# EAGLE board 006 (EAGLE 9.6.2)
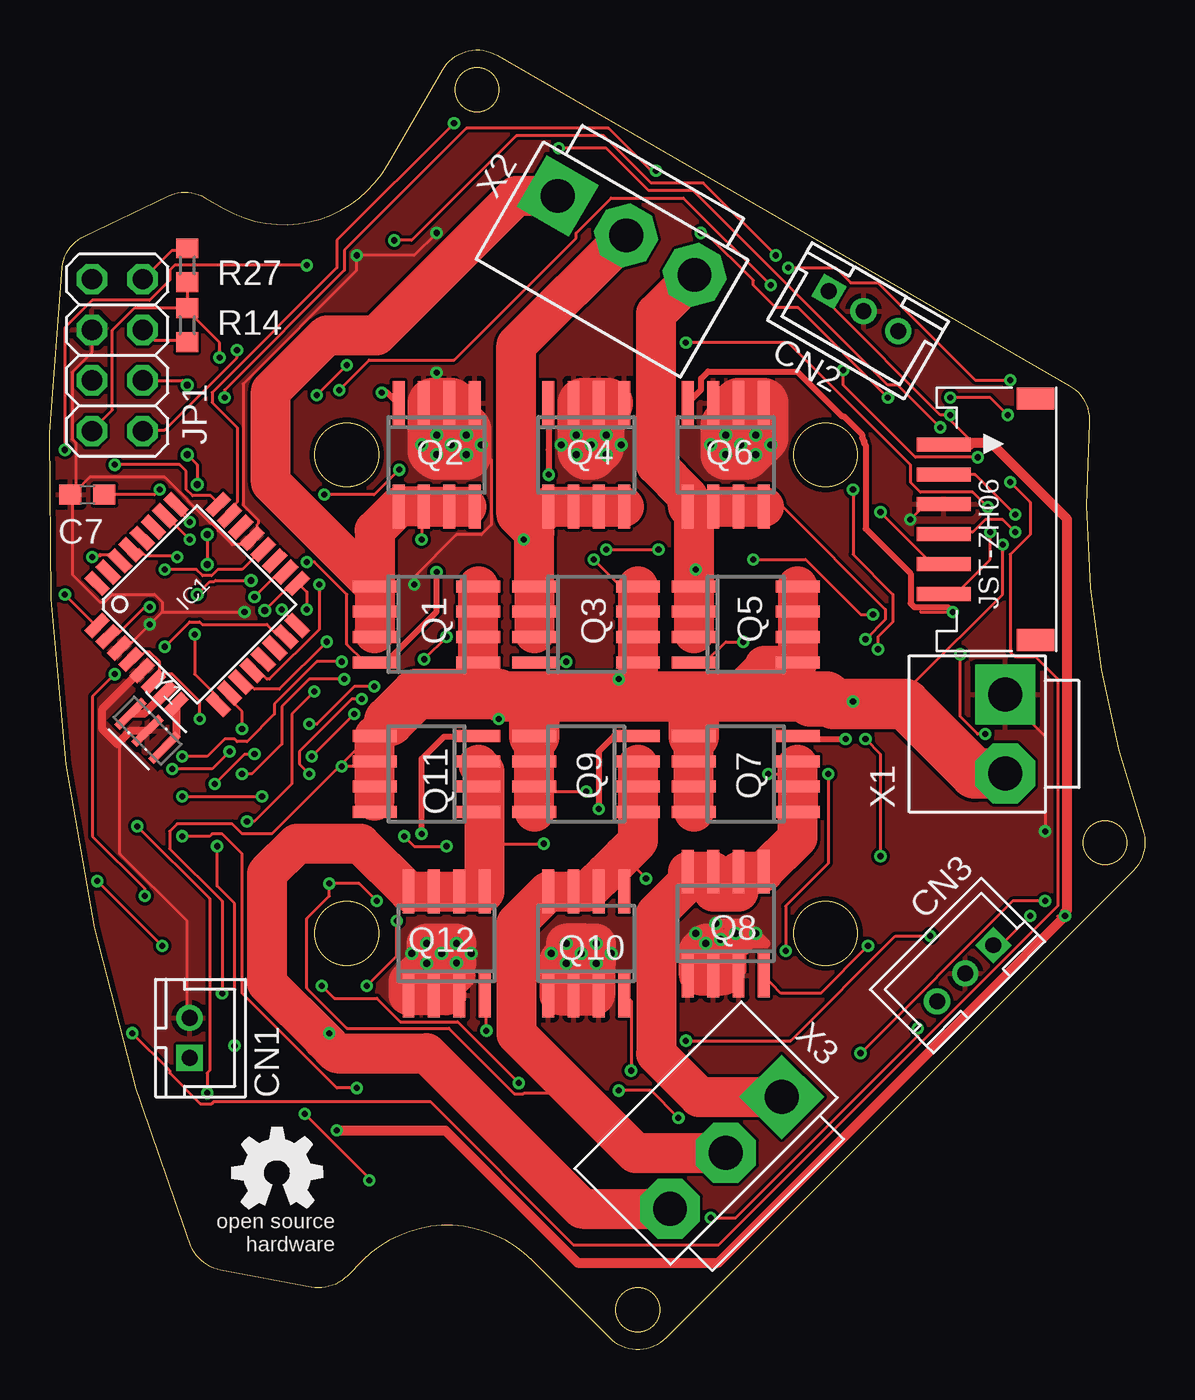
[diagram p0: board, top side]
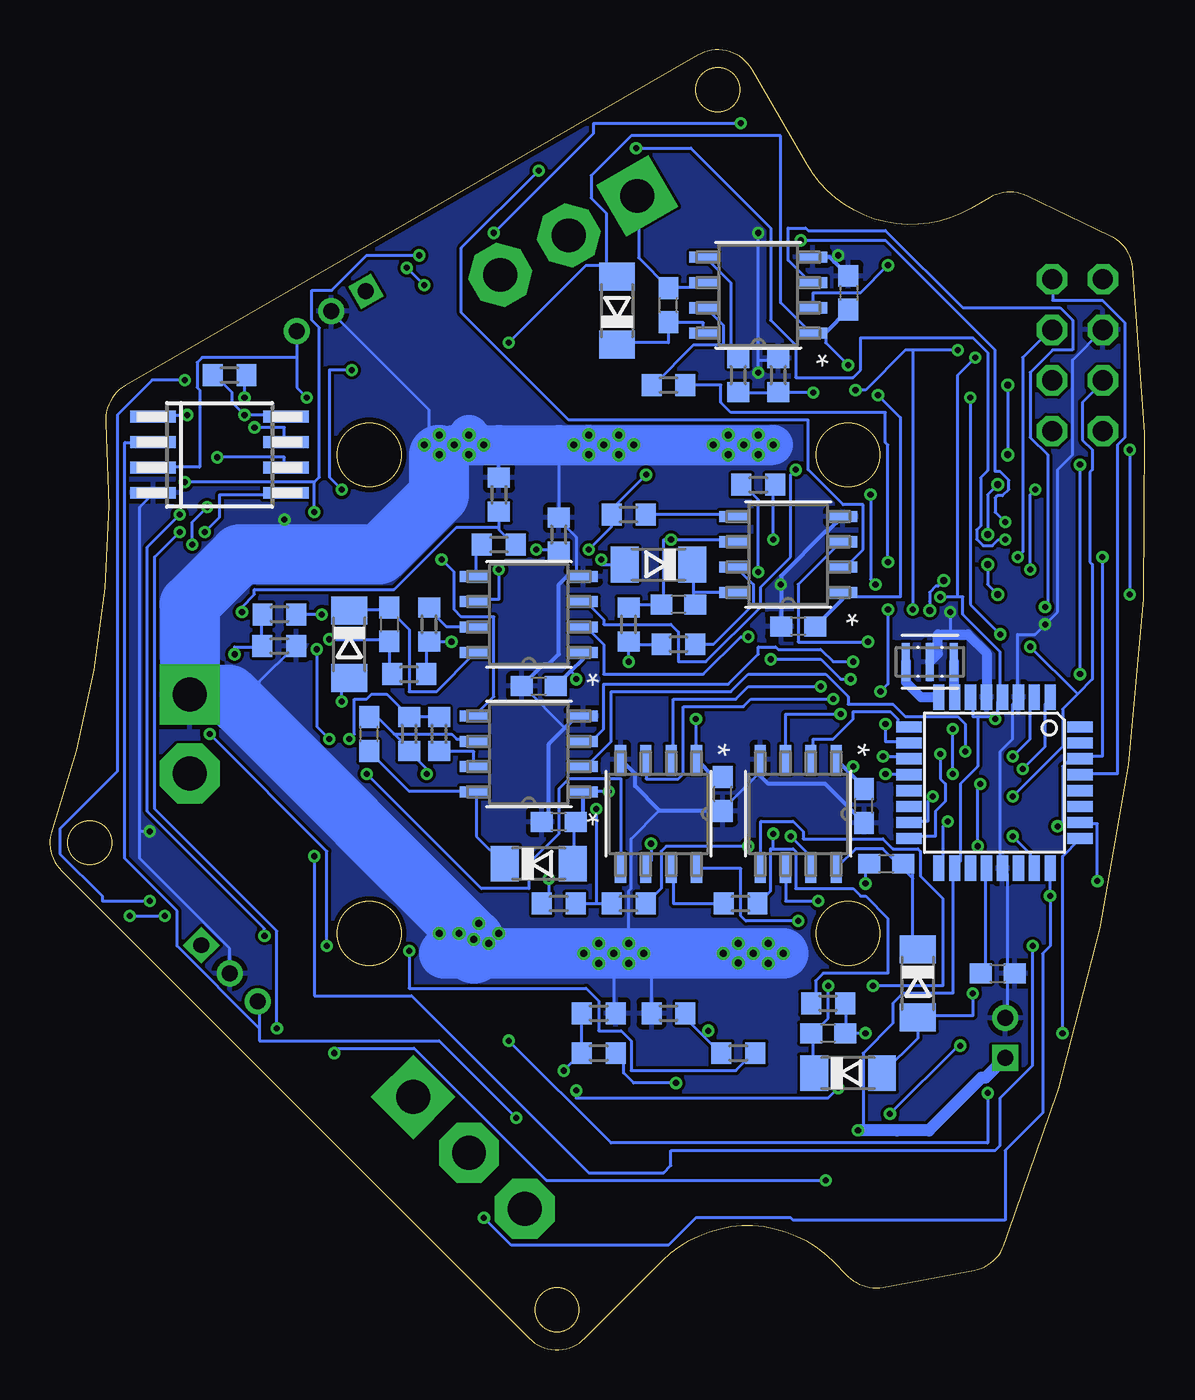
[diagram p1: board, bottom side, seen from below]

Size 54.89 x 65.17 mm. Coordinates in mm from the lower left corner, seen from the top.
Outline: 30.88,0.58 arc-90 28.05,0.58 24.17,4.47 arc90 15.68,4.47 14.89,3.69 arc-56 13.11,3.13 8.56,3.98 arc-58 7.07,5.22 arc-28 0.61,54.26 arc-58 1.73,55.84 5.91,57.84 arc-56 7.77,57.77 8.74,57.21 arc90 16.93,59.41 19.68,64.17 arc-90 22.41,64.9 51.1,48.34 arc-64 52.09,46.46 arc24 54.77,26.08 arc-64 54.3,24 30.88,0.58
Outline: circle at 14.88,20.87 radius 1.6
Outline: circle at 38.88,44.87 radius 1.6
Outline: circle at 38.88,20.87 radius 1.6
Outline: circle at 14.88,44.87 radius 1.6
Outline: circle at 52.89,25.42 radius 1.1
Outline: circle at 29.47,2 radius 1.1
Outline: circle at 21.41,63.17 radius 1.1
Copper layers (1*16): Top 0.035mm / dielectric 1.5mm / Bottom 0.035mm
Design rules "SeeedStudio_2layer_DRU_no_angle_20140221": minimum track width 6mil, minimum drill 12mil, track to track 6mil, track to pad 6mil, pad to pad 6mil, via to via 6mil, smd to smd 0mil, copper to edge 10mil, drill to drill 10mil, minimum pad ring 10mil, minimum via ring 6mil, stop-mask expansion 2mil, vias tented up to drill 100mil, thermal gap 10mil
Net classes: 0 default: width 0.152 mm

## Footprints (pad centres in the part's own frame; a part is rotated, then mirrored left to right if it is on the bottom)
C1608 = smd 1.1 x 1: 1 -0.85,0; 2 0.85,0
B2B-PH-K-S = drill 0.8 square: 1 -1,0 | drill 0.8: 2 1,0
B3B-PH-K-S = drill 0.8 square: 1 -2,0 | drill 0.8: 2 0,0; 3 2,0
SOD80C = smd 1.4 x 1.8: A 1.7,0; C -1.7,0
TQFP32-08 = smd 1.27 x 0.559: 1 -4.293,2.8; 2 -4.293,2; 3 -4.293,1.2; 4 -4.293,0.4; 5 -4.293,-0.4; 6 -4.293,-1.2; 7 -4.293,-2; 8 -4.293,-2.8; 17 4.293,-2.8; 18 4.293,-2; 19 4.293,-1.2; 20 4.293,-0.4; 21 4.293,0.4; 22 4.293,1.2; 23 4.293,2; 24 4.293,2.8 | smd 0.559 x 1.27: 9 -2.8,-4.293; 10 -2,-4.293; 11 -1.2,-4.293; 12 -0.4,-4.293; 13 0.4,-4.293; 14 1.2,-4.293; 15 2,-4.293; 16 2.8,-4.293; 25 2.8,4.293; 26 2,4.293; 27 1.2,4.293; 28 0.4,4.293; 29 -0.4,4.293; 30 -1.2,4.293; 31 -2,4.293; 32 -2.8,4.293
2X04 = drill 1.016 octagon: 1 -3.81,-1.27; 2 -3.81,1.27; 3 -1.27,-1.27; 4 -1.27,1.27; 5 1.27,-1.27; 6 1.27,1.27; 7 3.81,-1.27; 8 3.81,1.27
ZH-SM4-SIDE06 = smd 0.7 x 2.7: 1 -10.35,-5.65; 2 -8.85,-5.65; 3 -7.35,-5.65; 4 -5.85,-5.65; 5 -4.35,-5.65; 6 -2.85,-5.65 | smd 1.1 x 1.9: P$1 -0.55,-1.05; P$2 -12.65,-1.05
SO-08 = smd 0.6 x 2.2: 1 -1.905,-2.6; 2 -0.635,-2.6; 3 0.635,-2.6; 4 1.905,-2.6; 5 1.905,2.6; 6 0.635,2.6; 7 -0.635,2.6; 8 -1.905,2.6
R0603 = smd 1 x 1.1: 1 -0.85,0; 2 0.85,0
PG-DSO-8-910_INF = smd 1.46 x 0.559: 1 -2.724,1.905; 2 -2.724,0.635; 3 -2.724,-0.635; 4 -2.724,-1.905; 5 2.724,-1.905; 6 2.724,-0.635; 7 2.724,0.635; 8 2.724,1.905
SOIC8_EIAJ_208MIL = smd 0.6 x 2.286: 1 -1.905,-3.33; 2 -0.635,-3.33; 3 0.635,-3.33; 4 1.905,-3.33; 5 1.905,3.33; 6 0.635,3.33; 7 -0.635,3.33; 8 -1.905,3.33
B2P-VH = drill 1.7 pad 3 square: 1 -1.98,0 | drill 1.7 pad 3 octagon: 2 1.98,0
B3P-VH = drill 1.7 pad 3 square: 1 -3.96,0 | drill 1.7 pad 3 octagon: 2 0,0; 3 3.96,0
MURATA_CSTNE16M0V53C000R0_0 = smd 0.4 x 1.9: 1 -1.2,0; 2 0,0; 3 1.2,0

## Placement (x,y rotation side)
C1  10μ  [C1608]  23.88,52.37 90 bottom
C2  0.1μ  [C1608]  17.38,36.27 0 bottom
C3  10μ  [C1608]  23.38,37.37 180 bottom
C4  0.1μ  [C1608]  30.38,33.27 0 bottom
C5  10μ  [C1608]  37.88,36.37 270 bottom
C6  0.1μ  [C1608]  14.86,52.99 270 bottom
C7  0.1μ  [C1608]  1.88,42.87 180 top
C8  10μ  [C1608]  38.88,30.87 90 bottom
C9  0.1μ  [C1608]  21.15,27.87 90 bottom
C10  0.1μ  [C1608]  7.38,18.87 0 bottom
C11  10μ  [C1608]  12.97,24.37 180 bottom
C12  0.1μ  [C1608]  14.08,27.27 90 bottom
C13  10μ  [C1608]  15.88,15.87 0 bottom
C14  0.1μ  [C1608]  29.38,26.47 0 bottom
CN1  [B2B-PH-K-S]  7,15.63 90 top
CN2  [B3B-PH-K-S]  40.78,52.07 330 top
CN3  [B3B-PH-K-S]  45.88,18.87 225 top
D1  PMLL4150  [SOD80C]  24.38,39.37 180 bottom
D2  PMLL4150  [SOD80C]  39.88,35.37 270 bottom
D3  PMLL4150  [SOD80C]  30.38,24.37 0 bottom
D4  PMLL4150  [SOD80C]  11.38,18.37 270 bottom
D5  PMLL4150  [SOD80C]  14.88,13.87 0 bottom
D6  PMLL4150  [SOD80C]  26.46,52.1 90 bottom
IC1  MEGA8-AI  [TQFP32-08]  7.38,37.37 45 top
IC2  MEGA8-AI  [TQFP32-08]  7.54,28.43 270 bottom
JP1  [2X04]  3.38,49.87 90 top
P1  S6B-ZR-SM4A-TF  [ZH-SM4-SIDE06]  50.45,35.04 270 top
Q1  [SO-08]  18.88,36.37 270 top
Q2  [SO-08]  19.38,44.87 180 top
Q3  [SO-08]  26.88,36.37 270 top
Q4  [SO-08]  26.88,44.87 180 top
Q5  [SO-08]  34.88,36.37 270 top
Q6  [SO-08]  33.88,44.87 180 top
Q7  [SO-08]  34.88,28.87 90 top
Q8  [SO-08]  33.88,21.37 0 top
Q9  [SO-08]  26.88,28.87 90 top
Q10  [SO-08]  26.88,20.37 0 top
Q11  [SO-08]  18.88,28.87 90 top
Q12  [SO-08]  19.88,20.37 0 top
R1  47  [R0603]  23.88,48.37 0 bottom
R2  33k  [R0603]  19.38,43.37 180 bottom
R3  47  [R0603]  20.38,48.87 90 bottom
R4  33k  [R0603]  18.38,48.87 270 bottom
R5  47  [R0603]  23.38,35.37 180 bottom
R6  33k  [R0603]  25.88,36.37 270 bottom
R7  47  [R0603]  25.88,41.87 0 bottom
R8  33k  [R0603]  29.38,40.87 270 bottom
R9  47  [R0603]  35.88,36.37 270 bottom
R10  33k  [R0603]  36.88,33.87 0 bottom
R11  47  [R0603]  32.38,40.37 180 bottom
R12  33k  [R0603]  32.38,42.87 270 bottom
R13  33k  [R0603]  45.88,48.87 0 bottom
R14  33k  [R0603]  6.88,51.37 270 top
R15  47  [R0603]  35.38,30.87 90 bottom
R16  33k  [R0603]  36.88,30.87 90 bottom
R17  47  [R0603]  43.38,36.87 0 bottom
R18  33k  [R0603]  43.39,35.29 180 bottom
R19  47  [R0603]  25.88,22.37 180 bottom
R20  33k  [R0603]  29.38,22.37 0 bottom
R21  47  [R0603]  27.38,14.87 0 bottom
R22  33k  [R0603]  27.38,16.87 180 bottom
R23  47  [R0603]  20.27,22.37 0 bottom
R24  33k  [R0603]  15.88,17.37 180 bottom
R25  47  [R0603]  20.38,14.87 0 bottom
R26  33k  [R0603]  23.88,16.87 0 bottom
R27  33k  [R0603]  6.88,54.37 90 top
U1  IR2302STRPBF  [PG-DSO-8-910_INF]  19.38,52.87 180 bottom
U2  IR2302STRPBF  [PG-DSO-8-910_INF]  17.88,39.87 180 bottom
U3  IR2302STRPBF  [PG-DSO-8-910_INF]  30.88,36.87 180 bottom
U4  ATTINY85-20S  [SOIC8_EIAJ_208MIL]  46.38,44.87 270 bottom
U5  IR2302STRPBF  [PG-DSO-8-910_INF]  30.88,29.87 180 bottom
U6  IR2302STRPBF  [PG-DSO-8-910_INF]  17.38,26.87 270 bottom
U7  IR2302STRPBF  [PG-DSO-8-910_INF]  24.38,26.87 270 bottom
U$1  [OSHW_5MM]  11.38,8.87 0 top
X1  B2P-VH  [B2P-VH]  47.88,30.87 270 top
X2  B3P-VH  [B3P-VH]  28.88,55.87 330 top
X3  B3P-VH  [B3P-VH]  33.88,9.87 225 top
Y1  16Mhz  [MURATA_CSTNE16M0V53C000R0_0]  4.89,31.03 315 top
Y2  16Mhz  [MURATA_CSTNE16M0V53C000R0_0]  10.78,34.49 180 bottom

## Library data of the parts
C1-C14 = rcl; SPICEPREFIX: C
CN1-CN3 = jst-ph
D1-D6 = diode
IC1 IC2 = atmel; MPN: ATMEGA8-16AU; OC_FARNELL: 9171371; OC_NEWARK: 73M8863
JP1 = pinhead
P1 = zh
Q1-Q12 = transistor-power
R1-R27 = rcl; SPICEPREFIX: R
U1-U3 U5-U7 = IR2302; BUILT_BY: EMA_Cory; COPYRIGHT: Copyright (C) 2018 Accelerated Designs. All rights reserved; DATASHEET: https://www.infineon.com/dgdl/Infineon-IR2302-DataSheet-v01_00-EN.pdf?fileId=5546d462533600a4015355c988b216de; MANUFACTURER_PART_NUMBER: IR2302STRPBF; SOURCELIBRARY: Add_to_database_2021-04-22; VENDOR: Infineon
U4 = _hhn_attiny25_45_85
U$1 = oshw
X1-X3 = con-JST VH
Y1 Y2 = Murata - CSTNE16M0V53C000R0; AUTOMOTIVE: Yes; AUTOMOTIVE_GRADE: Grade 1; CENTROID_NOT_SPECIFIED: No; DATASHEET: https://www.murata.com/ja-jp/products/productdetail.aspx?partno=CSTNE16M0V53C000R0; DEVICE_CLASS_L1: Passive Components; DEVICE_CLASS_L2: Crystals / Oscillators; DEVICE_CLASS_L3: Resonators; DIGIKEY_DESCRIPTION: CERAMIC RES 16.0000MHZ 15PF SMD; DIGIKEY_PART_NUMBER: 490-17949-1-ND; FOOTPRINT_VARIANT_NAME_0: Recommended_Land_Pattern; FREQUENCY: 16MHz; HEIGHT: 1mm; LEAD_FREE: Yes; LOAD_CAPACITANCE: 15pF; MF: Murata; MFG_PACKAGE_IDENT: 0; MFG_PACKAGE_IDENT_DATE: 0; MFG_PACKAGE_IDENT_REV: 0; MOUSER_DESCRIPTION: Ceramic Resonator 16MHz ±0.5% (Tol) ±0.15% (Stability) 15pF 40Ohm Automotive 3-Pin CSMD T/R; MOUSER_PART_NUMBER: 81-CSTNE16M0V53C000R; MPN: CSTNE16M0V53C000R0; PACKAGE: SMD; PREFIX: Y; ROHS: Yes; SERIES: CSTNE_V_C; STABILITY: 0.15%; TEMPERATURE_RANGE_HIGH: +125°C; TEMPERATURE_RANGE_LOW: -40°C; TOLERANCE: 0.5%; VERIFICATION_VERSION: 0.0.0.3

## Nets
!RESET1: IC1.29 JP1.5 R14.2
!RESET2: IC2.29 JP1.7 R27.2
+5V: CN1.1 CN2.1 CN3.1 IC1.4 IC1.6 IC1.18 IC2.4 IC2.6 IC2.18 JP1.2 P1.1 R13.1 R14.1 R27.1 U4.8
EMERGENCY_R1: IC1.24 IC2.24 P1.4
EMERGENCY_R2: IC1.25 IC2.25 P1.5
EMERGENCY_T1: IC1.26 U4.7
EMERGENCY_T2: IC2.26 U4.6
ENC: P1.6 U4.5
ENC-1: CN2.3 IC1.23 U4.3
ENC-2: CN3.3 IC2.23 U4.2
GND: C2.1 C4.1 C6.1 C7.2 C9.1 C10.2 C12.1 C14.1 CN1.2 CN2.2 CN3.2 IC1.3 IC1.5 IC1.21 IC2.3 IC2.5 IC2.21 JP1.6 P1.3 Q2.1 Q2.2 Q2.3 Q4.1 Q4.2 Q4.3 Q6.1 Q6.2 Q6.3 Q8.1 Q8.2 Q8.3 Q10.1 Q10.2 Q10.3 Q12.1 Q12.2 Q12.3 R4.1 R8.1 R12.1 R18.1 R22.1 R26.1 U1.4 U2.4 U3.4 U4.4 U5.4 U6.4 U7.4 X1.1 Y1.2 Y2.2
MISO: IC1.16 IC2.16 JP1.1
MOSI: IC1.15 IC2.15 JP1.4
N$1: C3.1 D1.C U2.8
N$2: C1.1 D6.C U1.8
N$3: R1.1 U1.7
N$4: R5.1 U2.7
N$5: Q1.4 R1.2 R2.2
N$6: Q2.4 R3.1 R4.2
N$7: R3.2 U1.5
N$8: Q3.4 R5.2 R6.2
N$9: Q4.4 R7.1 R8.2
N$10: R7.2 U2.5
N$11: C5.1 D2.C U3.8
N$12: R9.1 U3.7
N$13: Q5.4 R9.2 R10.2
N$14: Q6.4 R11.1 R12.2
N$15: R11.2 U3.5
N$16: R13.2 U4.1
N$17: C8.1 D3.C U5.8
N$18: R15.1 U5.7
N$19: Q7.4 R15.2 R16.2
N$20: IC1.8 Y1.3
N$21: IC1.7 Y1.1
N$22: Q8.4 R17.1 R18.2
N$23: C7.1 IC1.20
N$24: R17.2 U5.5
N$25: IC2.8 Y2.3
N$26: IC2.7 Y2.1
N$27: C10.1 IC2.20
N$28: C11.1 D4.C U6.8
N$29: R19.1 U6.7
N$30: Q9.4 R19.2 R20.2
N$31: Q10.4 R21.1 R22.2
N$32: R21.2 U6.5
N$33: C13.1 D5.C U7.8
N$34: R23.1 U7.7
N$35: Q11.4 R23.2 R24.2
N$36: Q12.4 R25.1 R26.2
N$37: R25.2 U7.5
RX: IC1.30 IC2.30 P1.2
SCK: IC1.17 IC2.17 JP1.3
SS-1CH: IC1.14
SS-2CH: IC2.14
U_BLDC-1CH: C1.2 Q1.1 Q1.2 Q1.3 Q2.5 Q2.6 Q2.7 Q2.8 R2.1 U1.6 X2.1
U_BLDC-2CH: C8.2 Q7.1 Q7.2 Q7.3 Q8.5 Q8.6 Q8.7 Q8.8 R16.1 U5.6 X3.1
U_IN-1CH: IC1.1 U1.2
U_IN-2CH: IC2.1 U5.2
U_SD-1CH: IC1.2 U1.3
U_SD-2CH: IC2.2 U5.3
V_BLDC-1CH: C3.2 Q3.1 Q3.2 Q3.3 Q4.5 Q4.6 Q4.7 Q4.8 R6.1 U2.6 X2.2
V_BLDC-2CH: C11.2 Q9.1 Q9.2 Q9.3 Q10.5 Q10.6 Q10.7 Q10.8 R20.1 U6.6 X3.2
V_IN-1CH: IC1.9 U2.2
V_IN-2CH: IC2.9 U6.2
V_SD-1CH: IC1.11 U2.3
V_SD-2CH: IC2.11 U6.3
VDD: C2.2 C4.2 C6.2 C9.2 C12.2 C14.2 D1.A D2.A D3.A D4.A D5.A D6.A Q1.5 Q1.6 Q1.7 Q1.8 Q3.5 Q3.6 Q3.7 Q3.8 Q5.5 Q5.6 Q5.7 Q5.8 Q7.5 Q7.6 Q7.7 Q7.8 Q9.5 Q9.6 Q9.7 Q9.8 Q11.5 Q11.6 Q11.7 Q11.8 U1.1 U2.1 U3.1 U5.1 U6.1 U7.1 X1.2
W_BLDC-1CH: C5.2 Q5.1 Q5.2 Q5.3 Q6.5 Q6.6 Q6.7 Q6.8 R10.1 U3.6 X2.3
W_BLDC-2CH: C13.2 Q11.1 Q11.2 Q11.3 Q12.5 Q12.6 Q12.7 Q12.8 R24.1 U7.6 X3.3
W_IN-1CH: IC1.10 U3.2
W_IN-2CH: IC2.10 U7.2
W_SD-1CH: IC1.12 U3.3
W_SD-2CH: IC2.12 U7.3

## Tracks (layer width: path | path; a pad name or v marks a point on that pad's centre or on a via)
!RESET1  (via drill 0.3)
  Top 0.152: R14.2 6.88,50.62 5.26,50.62 4.76,51.12 JP1.5 | IC1.29 4.48,40.12 4.78,39.81 6.31,39.81 v6.38,39.74
  Bottom 0.152: v6.38,39.74 6.13,39.99 6.13,49.74 4.76,51.12 JP1.5
!RESET2
  Top 0.152: R27.2 6.88,55.12 6.13,55.12 4.76,53.74 JP1.7
  Bottom 0.152: IC2.29 3.13,28.87 1.38,28.87 1.38,45.37 1.01,45.74 1.01,51.49 2.13,52.62 4.63,52.62 4.63,53.62 JP1.7
+5V  (via drill 0.3)
  Top 0.152: v49.13,21.74 47.76,20.37 47.38,20.37 CN3.1 | 46.38,45.37 45.38,45.37 44.88,45.37 P1.1 | 46.38,45.37 47.13,45.37 50.88,41.62 v50.88,21.74 50.51,21.74 | 46.38,45.37 45.01,46.74 | 45.01,46.74 44.88,46.87 44.63,46.87 39.13,52.37 39.13,52.99 CN2.1 | 45.01,46.74 v45.13,46.87 | R27.1 6.88,52.24 | 6.88,52.24 4.26,52.24 3.13,51.12 3.13,47.12 2.13,46.12 JP1.2 | 6.88,52.24 R14.1 6.88,52.12 8.51,50.49 v8.51,49.74 | 5.51,33.87 5.51,33.74 5.26,33.49 IC1.6 5.51,33.87 | 5.51,33.87 5.51,34.49 5.01,34.99 4.76,34.99 4.38,34.62 4.13,34.62 IC1.4 | v10.26,37.74 11.38,38.87 11.76,38.87 IC1.18 | 5.51,33.87 6.13,33.87 7.51,32.49 v7.51,31.62 | IC1.18
  Top 0.508: v14.38,10.99 19.82,10.99 26.45,4.37 33.51,4.37 v50.88,21.74 50.88,21.93 50.99,22.04 50.99,41.64 47.18,45.45 46.21,45.45 46.12,45.37 45.38,45.37
  Bottom 0.152: R13.1 46.63,48.87 45.76,47.99 45.76,47.49 v45.13,46.87 43.13,46.87 U4.8 | v50.88,21.74 v49.13,21.74 | 7.63,31.74 7.38,31.99 7.38,32.49 7.26,32.62 IC2.4 7.26,32.74 7.26,34.99 9.13,36.87 9.13,37.74 9.38,37.74 | 8.38,31.74 8.63,31.74 8.63,32.62 IC2.6 | 8.38,31.74 7.63,31.74 | 8.38,31.74 8.38,29.24 9.26,28.37 9.26,24.49 9.51,24.24 IC2.18 9.63,24.12 9.63,17.87 12.13,17.87 12.63,17.37 12.63,16.37 14.13,14.87 14.13,10.99 | 9.38,37.74 v10.26,37.74 | 7.63,31.74 v7.51,31.62 | 14.13,10.99 12.43,10.99 10.63,10.99 CN1.1 | v8.51,49.74 9.38,48.87 9.38,37.74 | 14.13,10.99 v14.38,10.99
  Bottom 0.61: CN1.1 8,13.63 8.2,13.63 10.83,10.99 12.43,10.99 v14.38,10.99
EMERGENCY_R1  (via drill 0.3)
  Top 0.152: v4.76,22.74 4.76,23.12 2.13,25.74 2.13,32.74 v3.26,33.87 | v3.26,44.37 6.51,44.37 6.82,44.05 6.82,43.14 7.15,42.81 8.06,42.81 8.38,42.49 IC1.24 | v48.38,40.99 47.76,41.62 46.88,41.62 46.26,40.99 44.88,40.99 P1.4 | v43.51,16.12 43.51,15.74 34.38,6.62 v33.13,6.62 | IC1.24
  Bottom 0.152: v3.26,44.37 v3.26,33.87 | IC2.24 4.76,24.12 v4.76,22.74 4.76,20.24 5.13,19.87 5.13,11.87 7.01,9.99 7.01,6.49 17.63,6.49 17.76,6.62 22.51,6.62 23.88,5.24 31.76,5.24 v33.13,6.62 | v48.38,40.99 49.63,39.74 49.63,27.12 43.51,20.99 v43.51,16.12
EMERGENCY_R2  (via drill 0.3)
  Top 0.152: v4.13,15.87 6.01,13.99 6.01,13.87 7.54,12.33 8.1,12.33 8.21,12.44 19.06,12.44 26.26,5.24 33.51,5.24 50.51,22.24 50.51,33.62 49.38,34.74 48.38,34.74 48.13,34.99 48.13,39.87 49.13,40.87 49.13,42.49 v48.13,43.49 | v41.63,41.99 44.13,39.49 44.76,39.49 P1.5 | v17.26,55.62 18.13,55.62 23.38,60.87 27.76,60.87 30.13,58.49 32.76,58.49 v36.38,54.87 | 6.38,42.12 6.38,42.37 6.34,42.37 IC1.25 7.01,41.7 v7.01,41.49 6.38,42.12
  Bottom 0.152: v4.13,15.87 4.13,24.74 IC2.25 | 41.63,43.49 v48.13,43.49 | v41.63,41.99 41.63,43.49 | v7.01,41.49 7.51,41.99 7.51,42.7 7.4,42.81 7.15,42.81 6.82,43.14 6.82,43.6 7.26,44.03 7.51,44.03 7.51,50.12 13.01,55.62 v17.26,55.62 | v36.38,54.87 39.01,54.87 40.76,53.12 41.76,53.12 41.76,51.62 41.38,51.24 41.38,43.74 41.63,43.49
EMERGENCY_T1  (via drill 0.3)
  Top 0.152: v7.01,40.62 5.88,41.74 IC1.26 | v25.51,60.24 27.88,60.24 30.01,58.12 32.26,58.12 42.01,48.37 42.51,48.37 v44.63,46.24 | IC1.26
  Bottom 0.152: v25.51,60.24 22.76,60.24 18.76,56.24 18.76,51.62 17.51,50.37 17.51,48.74 14.63,48.74 14.26,49.12 14.26,50.74 8.63,50.74 7.88,49.99 7.88,44.08 8.24,43.72 8.24,41.29 8.44,41.1 8.44,40.64 8.11,40.31 7.65,40.31 7.34,40.62 v7.01,40.62 | v44.63,46.24 43.13,46.24 43.13,45.62 U4.7
EMERGENCY_T2  (via drill 0.3)
  Top 0.152: v5.63,20.24 v2.38,23.49 | v41.63,24.74 41.63,29.87 v40.88,30.62 | v41.51,35.12 41.51,35.74 42.26,36.49 42.26,37.87 40.26,39.87 v40.26,43.12 | v39.76,49.12 39.76,48.37 43.38,44.74 v46.51,44.74
  Bottom 0.152: v2.38,23.49 2.38,26.37 3.13,26.37 IC2.26 | v5.63,20.24 5.63,14.24 7.26,12.62 7.26,10.24 7.51,9.99 23.76,9.99 23.76,9.24 24.13,8.87 27.88,8.87 36.76,17.74 41.63,17.74 v41.63,24.74 | v40.88,30.62 41.51,31.24 v41.51,35.12 | v40.26,43.12 40.88,43.74 40.88,49.12 v39.76,49.12 | v46.51,44.74 43.13,44.74 43.13,44.24 U4.6
ENC  (via drill 0.3)
  Top 0.152: v47.13,40.99 47.13,39.62 45.51,37.99 44.88,37.99 P1.6
  Bottom 0.152: v47.13,40.99 46.38,41.74 46.38,42.87 43.13,42.87 U4.5
ENC-1  (via drill 0.3)
  Top 0.152: v20.26,61.49 14.38,55.62 14.38,54.24 8.13,47.99 8.13,47.49 9.38,46.24 9.38,42.49 9.01,42.12 9.01,41.87 9,41.86 | v32.63,55.99 32.88,55.99 35.26,53.62 35.26,53.37 36.38,52.24 37.51,52.24 v42.01,47.74 | 9,41.86 IC1.23 9,41.85 9,41.86
  Bottom 0.152: v20.26,61.49 27.63,61.49 27.63,60.99 v32.63,55.99 | v42.01,47.74 42.51,48.24 42.51,49.74 | 42.51,49.74 42.51,50.99 CN2.3 | 42.51,49.74 47.26,49.74 47.51,49.49 47.51,48.24 47.38,48.12 47.38,44.24 49.63,44.24 U4.3
ENC-2  (via drill 0.3)
  Top 0.152: v6.63,25.74 8.01,25.74 8.13,25.87 8.63,25.87 9.63,24.87 9.63,17.87 14.38,13.12 v15.38,13.12 | v28.51,12.99 30.13,12.99 v31.51,11.62
  Bottom 0.152: v6.63,25.74 5.76,24.87 5.76,24.37 5.63,24.24 IC2.23 | v15.38,13.12 15.88,12.62 28.51,12.62 v28.51,12.99 | v31.51,11.62 35.38,15.49 44.38,15.49 44.38,16.12 | 44.38,16.12 44.38,17.37 CN3.3 | 44.38,16.12 48.51,20.24 48.51,21.99 51.13,24.62 51.13,45.49 49.76,45.49 U4.2
GND  (via drill 0.3, 0.35)
  Top 0.152: 1.29,43.02 2.01,43.74 5.76,43.74 8.07,41.42 8.11,41.42 8.44,41.1 8.44,41.06 9.13,40.37 9.88,40.37 10.13,40.62 IC1.21 | 1.29,43.02 1.13,42.87 | 5.63,36.99 v5.01,36.37 3.88,35.24 3.51,35.24 IC1.3 | 5.63,36.99 5.63,37.49 5.26,37.87 3.13,37.87 2.76,37.49 2.51,37.49 1.13,38.87 1.13,42.87 | 1.13,42.87 C7.2 | 10.51,40.99 10.38,40.87 | 10.38,40.87 10.26,40.74 | 10.26,40.74 IC1.21 | 5.63,36.99 v9.76,36.99 | 3.38,30.37 3.51,30.24 3.51,24.87 6.88,21.49 6.88,16.74 CN1.2 | v27.88,44.87 27.52,45.23 | 21.29,45.99 21.26,45.99 v20.88,44.87 22.13,44.62 22.13,41.37 21.63,40.87 20.38,40.87 18.26,38.74 v18.26,38.37 | v19.38,48.99 19.38,47.47 | Q4.3 26.26,47.49 Q4.2 28.76,47.49 Q4.1 | v43.13,41.62 43.88,42.37 44.76,42.37 P1.3 | v49.88,25.99 49.88,30.74 47.88,32.74 X1.1 | v19.38,55.99 18.26,54.87 v15.38,54.87 15.38,54.12 9.69,48.42 9.69,42.35 10.44,41.6 10.44,41.41 10.38,41.34 10.38,40.87 | IC1.21 10.19,40.74 10.26,40.74 | 34.52,18.87 34.52,20.23 33.88,20.87 v33.38,21.37 | JP1.6 2.11,50 1.12,49.01 1.12,45.65 1.29,45.48 1.29,43.02
  Top 0.2: v20.38,19.39 20.38,17.9 Q12.3 21.13,18.38 v21.13,19.87 | Q12.2 18.88,18.13 v18.88,19.37 | Q10.1 24.98,19.46 v25.88,20.37 v27.38,20.37 | Q10.1 25.53,18.32 25.53,19.52 | Q10.1 24.98,18.46 v25.88,19.37 | v27.38,19.37 27.38,18.9 Q10.2 | Q10.2 26.63,18.15 v26.63,19.87 | Q10.3 28.13,18.38 v28.13,19.87 | Q10.2 26.25,18.75 v25.13,19.87 | 19.88,17.77 19.88,19 v18.13,19.87 | 32.28,18.77 Q8.1 32.13,18.92 | Q8.2 33.28,18.77 v35.38,20.87 | 34.13,19.37 34.13,19.15 Q8.3 | Q8.3 34.38,18.9 v34.38,20.87 | Q8.3 34.48,18.77 v32.88,20.37
  Top 0.203: Q8.1 32.38,19.17 v32.38,20.87 32.38,19.63 Q8.2 | Q8.1 31.98,18.92 v33.63,20.58 | Q8.1 31.98,19.46 v32.88,20.37
  Top 0.305: v20.88,45.87 19.28,47.47 Q2.3 20.88,45.33 v20.88,44.87 | Q2.2 19.38,46.83 v19.38,44.87 | 20.11,47.47 v20.11,45.37 | Q2.2 20.02,46.5 v19.38,45.87 | Q2.2 20.02,46.75 v18.63,45.37 | v21.63,45.37 21.29,45.71 21.29,45.99 Q2.1 | 20.13,47.35 20.13,46.85 | Q4.3 26.25,46 v26.38,45.87 | Q4.1 28.63,47.31 v28.63,45.37 | v26.38,44.87 26.38,46.33 Q4.2 27.52,46.23 v27.88,45.87 27.38,45.37 v27.13,45.37 | v25.63,45.37 26.38,45.37 26.88,44.87 | Q6.3 33.13,47.35 v33.13,45.37 | 35.26,46.24 v36.13,45.37 | v33.88,45.87 35.62,45.87 35.75,45.73 | v35.38,44.87 35.79,45.27 Q6.1 35.79,46.27 v35.38,45.87 | v34.63,45.37 34.63,47.35 Q6.2 34.03,47.47 35.26,46.24 | v33.88,44.87 35.26,46.24
  Top 0.406: Y1.2 4.04,31.03 3.38,30.37 2.63,31.12 2.63,32.12 4.56,34.05 IC1.5
  Top 0.508: v32.38,20.87 32.88,20.87 v33.38,21.37 34.88,21.37 v35.38,20.87 | v35.38,20.87 33.88,20.87 | v35.38,20.87 35.88,20.37 34.66,20.37 34.66,19.01 34.52,18.87 Q8.3
  Top 1.27: v32.88,20.37 34.66,20.37
  Top 2: 19.88,17.77 Q12.1 17.98,18.46 v18.88,19.37 v18.88,20.37 v20.38,20.37 v20.38,19.39 20.33,19.34 | Q12.2 20.33,18.85 20.33,19.34 | Q10.2 26.75,18.27 26.75,20.23 | Q10.2 27.33,17.77 27.33,19.34 27.38,19.39 v27.38,20.37 26.88,20.37 | 26.75,20.23 26.88,20.37 | Q10.2 25.53,17.77 25.53,19.02 | 26.88,20.37 v25.88,20.37 25.88,20.32 | 26.75,20.23 25.53,19.02 | 25.53,19.52 25.53,19.02 | 20.33,19.34 20.33,19.82 | v32.88,20.37 32.53,20.02 32.53,18.77 Q8.2 33.76,18.77
  Top 2.54: Q2.2 20.11,47.47 | Q2.2 19.38,47.47 19.2,47.47 19.2,45.05 v19.38,44.87 v20.88,44.87 20.88,46.1 20.13,46.85 | Q4.2 26.7,47.47 26.7,45.05 26.88,44.87 27.15,44.87 27.52,45.23 Q4.2 | Q4.2 27.96,47.47 | Q6.2 35.75,47.47 35.75,45.73 34.89,44.87 v33.88,44.87 33.88,46.37 | Q2.2 20.13,47.35
  Bottom 0.152: 15.57,54.55 15.38,54.74 v15.38,54.87 | v9.76,36.99 9.76,35.87 | 6.88,18.62 6.63,18.87 C10.2 6.88,18.62 | 6.88,18.62 6.88,16.74 CN1.2 | 6.88,18.62 6.88,23.87 7.13,24.12 IC2.21 7.26,24.24 7.26,29.99 6.63,30.62 6.63,32.37 6.38,32.62 IC2.3 6.38,32.74 6.38,35.87 5.51,35.87 v5.01,36.37 4.38,36.99 4.38,44.12 3.63,44.87 3.63,49.62 JP1.6 | 50.38,25.99 50.38,24.62 45.88,20.12 CN3.2 | 50.38,25.99 50.38,42.24 49.76,42.87 U4.4 | 29.07,31.18 31.13,33.24 C4.1 | v27.88,45.87 27.88,45.37 | 29.38,45.37 R8.1 29.38,41.62 28.51,40.74 28.51,38.87 U3.4 | R12.1 32.38,45.37 | 19.38,49.62 18.38,49.62 R4.1 | v19.38,48.99 19.38,49.62 | v18.26,38.37 18.23,38.37 | C9.1 21.13,27.12 19.38,28.87 U6.4 | 24.76,19.87 24.76,16.87 R26.1 | v26.63,19.87 26.63,16.87 R22.1 | R18.1 42.63,35.24 44.38,33.49 44.38,33.37 45.4,32.35 | CN2.2 40.76,51.99 35.88,47.12 35.88,46.24 v35.38,44.87 34.01,45.37 33.69,45.68 | v43.13,41.62 43.13,39.87 | 24.33,27.04 25.76,25.62 25.76,23.12 25.88,22.99 25.88,19.87 | v49.88,25.99 50.38,25.99 | 19.38,49.62 v19.38,55.99
  Bottom 0.2: v18.88,20.37 19.13,20.37 v19.63,19.87 19.13,19.37 v18.88,19.37 18.26,19.99 v18.13,19.87 19.16,20.61 v20.38,19.39 20.66,19.39 v21.13,19.87 20.63,20.37 v20.38,20.37 | v25.13,19.87 25.38,19.87 v25.88,19.37 26.13,19.37 v26.63,19.87 | v26.63,19.87 26.38,19.87 v25.88,20.37 | v27.38,20.37 27.88,19.87 | 27.88,19.87 v27.38,19.37 27.13,19.37 v26.63,19.87 | 27.88,19.87 v28.13,19.87 | 35.59,20.37 35.13,19.87 | 33.63,19.87 34.38,19.87 v35.38,20.87 | 32.88,19.37 33.13,19.37 33.63,19.87 | 33.63,19.87 33.76,19.99 33.38,20.37 v32.88,20.37 32.38,19.87 32.13,19.87 | C6.1 15.57,54.55 15.8,54.77 U1.4 | C4.1 30.13,34.37 29.88,34.37 29.38,34.87 29.38,38.37 28.98,38.77 U3.4 | C14.1 29.88,26.82 29.88,30.37 29.07,31.18 28.48,31.77 U5.4 | U7.4 25.55,28.85 25.55,28.25 24.33,27.04 24.31,27.02 C9.1 | C12.1 16.03,28.37 18.88,28.37 19.29,28.77 U6.4 | U2.4 15.89,41.03 15.99,41.03 18.23,38.79 18.23,38.37 C2.1
  Bottom 0.508: Y2.2 10.38,34.89 10.38,35.87 9.76,35.87 8.88,35.87 7.94,34.93 IC2.5
  Bottom 2: 46.9,32.85 X1.1 45.86,32.85 | v34.63,45.37 34.01,45.37 v33.13,45.37 | v33.88,45.87 33.69,45.68 33.38,45.37 32.38,45.37 29.38,45.37 27.88,45.37 v18.63,45.37
  Bottom 2.54: v18.13,19.87 24.76,19.87 25.88,19.87 v26.63,19.87 27.88,19.87 | v28.13,19.87 35.13,19.87
  Bottom 3: 46.9,32.85 45.9,32.85 45.4,32.35 v33.63,20.58 33.63,19.87 | v35.38,44.87 35.38,42.87 38.38,39.87 43.13,39.87 45.38,39.87 47.88,37.37 X1.1
  pour Bottom: -0.62,65.37 56.38,65.37 56.38,-0.63 -0.62,-0.63
  pour Top: -0.62,65.37 -0.62,-0.63 56.38,-0.63 56.38,65.37
MISO  (via drill 0.3)
  Top 0.152: v10.26,29.87 9.76,29.87 v8.26,28.37 | v8.38,25.24 8.38,23.24 9.26,22.37 v9.26,15.24 | v16.01,8.49 16.01,8.59 v12.78,11.82 | v40.63,14.87 48.26,22.49 v49.88,22.49 | v48.13,48.62 46.38,48.62 41.51,53.49 40.13,53.49 39.38,54.24 v37.01,54.24 | v36.13,53.37 31.76,57.74 28.13,57.74 26.38,55.99 26.38,55.74 20.26,49.62 16.01,49.62 v14.51,48.12 | v9.38,50.12 9.38,49.74 5.76,46.12 4.76,46.12 JP1.1 | v11.63,37.12 12.38,36.37 IC1.16
  Bottom 0.152: v10.26,29.87 10.26,28.62 10.01,28.37 10.01,27.49 10.51,26.99 10.51,25.74 11.76,25.74 IC2.16 | v8.26,28.37 8.38,28.24 v8.38,25.24 | v12.78,11.82 9.36,15.24 v9.26,15.24 | v16.01,8.49 30.01,8.49 36.63,15.12 40.63,15.12 v40.63,14.87 | v49.88,22.49 52.26,22.49 52.26,22.74 54.38,24.87 54.38,26.12 51.51,28.99 51.51,46.87 49.76,48.62 v48.13,48.62 | v36.13,53.37 v37.01,54.24 | v14.51,48.12 14.01,48.12 12.01,50.12 11.63,50.12 | v9.38,50.12 11.63,50.12 | 11.63,50.12 v11.63,37.12
MOSI  (via drill 0.3)
  Top 0.152: v6.63,27.74 v10.63,27.74 | v5.76,35.24 7.01,36.49 7.51,36.49 7.63,36.37 10.88,36.37 11.38,35.87 11.76,35.87 IC1.15
  Bottom 0.152: v10.63,27.74 10.88,27.49 10.88,26.49 11.76,26.49 IC2.15 | v6.63,27.74 4.13,30.24 4.13,32.12 3.38,32.87 | 3.38,32.87 2.63,33.62 2.63,39.37 2.76,39.49 2.76,43.99 2.63,44.12 2.63,45.12 3.13,45.62 3.13,47.49 2.13,48.49 JP1.4 | 3.38,32.87 v5.76,35.24
N$1
  Bottom 0.152: 22.63,37.99 22.63,39.37 D1.C | 22.63,37.99 22.63,37.37 C3.1 | 22.63,37.99 20.63,37.99 U2.8
N$2
  Bottom 0.152: 23.88,51.49 22.13,51.49 22.13,50.99 U1.8 | 23.88,51.49 23.88,50.49 26.38,50.49 D6.C | 23.88,51.49 C1.1
N$3
  Bottom 0.152: R1.1 24.63,48.37 22.63,50.37 21.13,50.37 21.13,51.37 22.01,52.24 U1.7
N$4
  Bottom 0.152: R5.1 21.63,35.37 19.63,37.37 19.63,38.37 20.51,39.24 U2.7
N$5  (via drill 0.3)
  Top 0.152: v12.88,39.49 13.26,39.49 14.88,37.87 14.88,35.37 15.76,34.49 16.26,34.49 Q1.4
  Top 0.305: Q1.4 16.43,34.61 16.99,34.61 19.38,37 v19.38,38.99
  Bottom 0.152: v19.38,38.99 19.38,42.62 20.13,43.37 R2.2 | R1.2 21.26,48.37 21.26,47.49 20.76,46.99 13.01,46.99 13.01,45.49 12.88,45.37 v12.88,39.49
N$6  (via drill 0.3)
  Top 0.152: 17.41,47.48 Q2.4
  Top 0.305: v16.63,47.99 16.9,47.99 17.41,47.48
  Bottom 0.152: 18.38,47.99 20.38,47.99 R3.1 | v16.63,47.99 18.38,47.99 | 18.38,47.99 R4.2
N$7
  Bottom 0.152: R3.2 20.38,49.74 20.76,50.12 20.76,53.49 22.01,54.74 U1.5
N$8  (via drill 0.3)
  Top 0.305: Q3.4 25.85,34.46 v25.88,34.49
  Bottom 0.152: 25.88,35.37 R5.2 | 25.88,35.37 R6.2 25.88,35.49 | v25.88,34.49 25.88,35.37
N$9  (via drill 0.3)
  Top 0.152: v27.88,40.12 v30.51,40.12
  Top 0.305: v25.01,43.87 25.01,45.1 25,45.1 25,47.44 Q4.4
  Bottom 0.152: v30.51,40.12 29.38,40.12 R8.2 | v27.88,40.12 26.76,41.24 26.76,41.87 R7.1 26.63,41.87 26.63,42.24 v25.01,43.87
N$10
  Bottom 0.152: R7.2 20.63,41.87 U2.5
N$11
  Bottom 0.152: 37.88,37.12 39.88,37.12 D2.C | 37.88,37.12 36.88,36.12 36.88,32.99 35.51,32.99 33.63,34.87 U3.8 | 37.88,37.12 C5.1
N$12
  Bottom 0.152: R9.1 35.88,37.12 35.01,36.24 33.63,36.24 U3.7
N$13  (via drill 0.3)
  Top 0.152: v34.76,35.49 33.88,35.49 32.88,34.49 32.38,34.49 Q5.4
  Bottom 0.152: 35.88,35.49 36.01,35.37 36.01,33.87 R10.2 | v34.76,35.49 35.88,35.49 | 35.88,35.49 R9.2
N$14  (via drill 0.3)
  Top 0.152: 43.63,36.99 v45.26,36.99 | 40.88,45.37 40.88,45.62 37.51,48.99
  Top 0.305: Q6.4 32.64,48.13 32.64,48.69 32.99,49.04 37.46,49.04 37.51,48.99 39.7,46.8 39.79,46.8 40.71,45.88 40.71,45.72 40.82,45.43 40.88,45.37 40.89,45.35 40.89,41.16 43.15,38.91 43.15,37.41 43.32,37.23 45.02,37.23 v45.26,36.99
  Bottom 0.152: R12.2 32.38,41.24 | 32.38,41.24 32.38,41.12 31.63,40.37 R11.1 | 32.38,41.24 34.51,41.24 37.63,38.12 44.63,38.12 44.63,37.87 45.26,37.24 v45.26,36.99
N$15
  Bottom 0.152: R11.2 33.26,40.37 33.51,40.12 33.51,38.87 U3.5
N$16  (via drill 0.3)
  Top 0.152: v45.13,47.74 47.13,47.74 v48.01,46.87
  Bottom 0.152: v45.13,47.74 45.13,48.87 R13.2 | v48.01,46.87 49.63,46.87 U4.1
N$17
  Bottom 0.152: C8.1 38.88,29.99 36.88,27.99 33.63,27.99 U5.8 33.51,27.87 33.51,25.74 32.13,24.37 D3.C
N$18
  Bottom 0.152: R15.1 35.38,29.99 33.63,29.99 33.63,29.24 U5.7
N$19  (via drill 0.3)
  Top 0.305: Q7.4 37.63,30.62 38.02,30.62 38.03,30.62 v39.88,30.62
  Bottom 0.152: 36.88,31.74 35.38,31.74 R15.2 | 36.88,31.74 38.01,32.87 38.76,32.87 39.01,32.62 39.63,32.62 39.63,30.87 v39.88,30.62 | 36.88,31.74 R16.2
N$20
  Top 0.406: IC1.8 6.33,30.76 Y1.3
N$21
  Top 0.406: IC1.7 4.72,31.87 Y1.1
N$22  (via drill 0.3)
  Top 0.152: v45.63,34.87 45.63,31.74 46.51,30.87 v46.88,30.87 | v41.01,20.24 38.63,17.87 36.64,17.87 Q8.4
  Bottom 0.152: R17.1 44.26,36.87 44.26,35.37 R18.2 44.26,35.24 45.63,35.24 v45.63,34.87 | v46.88,30.87 41.01,24.99 v41.01,20.24
N$23  (via drill 0.3)
  Top 0.152: C7.1 5.26,42.87 v5.51,43.12 | IC1.20 10.63,40.12 9.63,39.12 8.42,39.12 8.11,38.81 7.65,38.81 7.34,39.12 v5.76,39.12 | IC1.20
  Bottom 0.152: v5.51,43.12 5.76,42.87 v5.76,39.12
N$24  (via drill 0.3)
  Top 0.152: v41.26,36.87 40.63,36.87 37.88,39.62 v35.26,39.62
  Bottom 0.152: v41.26,36.87 R17.2 | v35.26,39.62 34.63,38.99 34.63,37.12 34.26,36.74 32.63,36.74 32.63,32.74 33.51,31.87 U5.5
N$25
  Bottom 0.508: Y2.3 11.98,33.47 11.23,32.72 IC2.8
N$26
  Bottom 0.508: 9.54,33.13 IC2.7 9.58,32.76 Y2.1
N$27
  Bottom 0.152: C10.1 8.13,18.87 8.01,18.99 8.01,24.12 IC2.20
N$28
  Bottom 0.152: 11.63,23.62 11.63,20.37 11.38,20.12 D4.C | 11.63,23.62 11.63,23.99 12.01,24.37 C11.1 | 11.63,23.62 13.13,25.12 14.51,25.12 15.38,24.24 U6.8
N$29  (via drill 0.3)
  Top 0.152: v19.88,25.24 18.26,25.24 v17.76,25.74
  Bottom 0.152: v19.88,25.24 24.01,25.24 24.26,24.99 24.26,23.12 25.01,22.37 R19.1 | v17.76,25.74 16.76,24.74 16.76,24.24 U6.7
N$30  (via drill 0.3)
  Top 0.305: Q9.4 28.29,30.77 27.51,29.99 v27.51,27.12
  Bottom 0.152: R20.2 27.51,22.37 | 27.51,22.37 R19.2 | v27.51,27.12 27.51,22.37
N$31  (via drill 0.3)
  Top 0.152: v29.13,13.99 29.13,17.49 28.88,17.74 Q10.4
  Bottom 0.152: 28.26,14.87 28.26,16.87 R22.2 | v29.13,13.99 28.26,14.87 | 28.26,14.87 R21.1
N$32  (via drill 0.3)
  Top 0.152: v13.63,18.24 14.26,17.62 16.39,17.62 17.57,16.44 20.43,16.44 v23.51,13.37
  Bottom 0.152: v23.51,13.37 25.63,13.37 26.13,13.87 26.13,14.49 26.51,14.87 R21.2 | v13.63,18.24 10.13,18.24 10.13,22.62 11.26,23.74 11.26,24.99 11.38,25.12 12.63,25.12 13.13,25.62 17.13,25.62 17.13,25.99 17.63,26.49 19.26,26.49 19.26,24.24 U6.5
N$33  (via drill 0.3)
  Top 0.152: v17.38,21.49 17.38,19.74 v15.88,18.24
  Bottom 0.152: 16.63,15.87 16.63,13.87 D5.C | v17.38,21.49 20.01,21.49 20.26,21.74 20.26,24.12 22.38,24.12 U7.8 | v15.88,18.24 15.88,16.62 16.63,15.87 | 16.63,15.87 C13.1
N$34
  Bottom 0.152: R23.1 23.63,22.37 23.63,24.12 U7.7
N$35  (via drill 0.3)
  Top 0.152: 20.88,30.74 21.38,30.74 Q11.4
  Top 0.305: v18.63,25.87 18.63,29.62 19.76,30.74 20.88,30.74
  Bottom 0.152: 18.63,25.12 18.76,25.12 18.76,22.99 19.38,22.37 R23.2 | 18.63,25.12 17.63,25.12 17.51,24.99 17.51,23.12 14.63,23.12 14.26,22.74 14.01,22.74 12.88,21.62 12.88,18.87 16.13,18.87 16.51,18.49 16.51,17.49 16.63,17.37 R24.2 | 18.63,25.12 v18.63,25.87
N$36  (via drill 0.3)
  Top 0.152: v21.88,15.99 21.88,17.74 Q12.4
  Bottom 0.152: 22.13,15.74 23.01,16.62 23.01,16.87 R26.2 | 22.13,15.74 21.26,14.87 R25.1 | 22.13,15.74 v21.88,15.99
N$37  (via drill 0.3)
  Top 0.152: v36.88,19.99 36.88,22.24 39.01,24.37 v39.01,28.87
  Bottom 0.152: v36.88,19.99 36.88,18.12 28.01,18.12 27.38,17.49 27.38,15.99 26.26,15.99 25.76,15.49 25.76,13.99 20.51,13.99 19.63,14.87 R25.2 | v39.01,28.87 33.26,23.12 30.88,23.12 30.88,24.37 29.38,25.87 29.38,28.12 28.88,28.62 26.26,28.62 26.26,24.24 U7.5
RX  (via drill 0.3)
  Top 0.152: v2.13,39.74 2.38,39.74 2.44,39.8 | 2.51,39.87 2.44,39.8 | v48.38,41.87 46.38,43.87 44.88,43.87 P1.2 | v44.13,20.74 42.38,20.74 37.13,15.49 v31.88,15.49 | v7.88,12.87 7.88,13.87 8.01,13.99 8.01,22.62 v4.38,26.24 | IC1.30 3.28,39.77 3.19,39.86 2.58,39.86 2.53,39.8 2.44,39.8
  Bottom 0.152: v2.13,39.74 2.13,29.74 3.13,29.74 IC2.30 3.76,29.62 4.13,29.24 4.13,26.49 v4.38,26.24 | v48.38,41.87 50.01,40.24 50.01,26.99 44.13,21.12 v44.13,20.74 | v31.88,15.49 26.76,10.37 7.88,10.37 v7.88,12.87
SCK  (via drill 0.3, 0.35)
  Top 0.152: v9.88,26.49 10.26,26.49 12.13,28.37 12.13,31.87 v13.26,32.99 | v12.88,37.12 12.88,37.99 12.51,38.37 | IC1.17 12.45,38.37 12.51,38.37 | IC1.17 12.51,38.37 | JP1.3 6.65,48.6 v6.88,48.37 | v6.88,44.87 7.38,44.37 v7.38,43.37 | v7.88,40.87 v7.88,39.37 | v7.38,37.87 8.02,38.5 8.24,38.5 8.3,38.57 v10.08,38.57 | v10.78,37.07 12.13,38.42 IC1.17
  Bottom 0.152: v9.88,26.49 10.13,26.24 10.13,24.37 10.26,24.24 IC2.17 | v13.26,32.99 12.88,33.37 v12.88,37.12 | v6.88,48.37 v6.88,44.87 | v7.38,43.37 7.88,42.87 v7.88,40.87 | v7.88,39.37 7.88,38.37 v7.38,37.87 | v10.08,38.57 10.37,38.27 10.48,38.27 10.79,37.96 10.79,37.52 10.78,37.51 v10.78,37.07
U_BLDC-1CH  (via drill 0.3)
  Top 0.152: v18.63,40.62 18.63,41.37 Q2.6 | 16.28,35.99 16.38,35.99 Q1.3
  Top 0.406: Q2.8 20.88,42.27 Q2.7 Q2.6 | Q1.3 16.28,35.87 | 16.28,36.87 Q1.2 Q1.1
  Top 2: 16.28,36.87 16.28,41.07 Q2.5 Q2.6 20.88,42.27 | Q1.1 11.08,43.47 11.08,48.07 13.88,50.87 16.38,50.87 23.36,57.85 X2.1 | Q1.2 16.28,35.99 16.28,35.91
  Bottom 0.152: 23.88,53.24 22.13,53.24 22.13,53.49 U1.6 | v18.63,40.62 18.63,43.37 R2.1 | 23.88,53.24 25.38,54.74 25.38,57.74 X2.1 | 23.88,53.24 C1.2
U_BLDC-2CH  (via drill 0.3)
  Top 0.152: Q8.7 33.26,23.99 33.26,22.97 | 37.48,26.99 37.51,26.99 Q7.1 | Q8.6 34.51,23.99 34.51,22.97 | Q7.2 37.51,28.24 Q7.2 | Q7.3 37.51,29.62 37.48,29.32 | v36.01,28.87 37.48,28.87
  Top 1.5: Q7.3 Q7.1
  Top 2: Q8.7 Q8.8 31.98,23.46 30.38,21.87 30.38,14.83 32.55,12.67 X3.1 | 33.26,22.97 34.51,22.97 | Q8.6 Q8.5 37.48,25.66 Q7.1 37.48,26.99 Q7.2 37.48,28.87 37.48,29.32
  Bottom 0.152: 37.63,30.87 38.38,31.62 38.88,31.62 C8.2 | 37.63,30.87 36.88,30.12 R16.1 36.88,29.99 36.01,29.12 v36.01,28.87 | 37.63,30.87 34.76,30.87 34.51,30.62 33.63,30.62 U5.6
U_IN-1CH  (via drill 0.3)
  Top 0.152: v0.76,37.87 2.26,36.37 IC1.1 | v0.76,45.12 0.76,51.24 2.13,52.62 5.01,52.62 6.01,53.62 6.01,54.12 6.26,54.37 v12.88,54.37
  Bottom 0.152: v0.76,45.12 v0.76,37.87 | v12.88,54.37 14.26,52.99 16.63,52.99 16.63,52.24 U1.2
U_IN-2CH  (via drill 0.3)
  Top 0.152: v6.13,29.12 8.13,29.12 v9.01,29.99
  Bottom 0.152: v6.13,29.12 5.01,30.24 5.01,32.37 4.76,32.62 IC2.1 | v9.01,29.99 9.01,31.37 9.38,31.74 12.01,31.74 12.63,32.37 14.88,32.37 14.88,32.74 16.01,33.87 19.88,33.87 20.76,32.99 26.76,32.99 26.76,30.49 28.01,29.24 U5.2
  Bottom 0.2: 28.01,29.23 U5.2
U_SD-1CH  (via drill 0.3)
  Top 0.152: v5.01,37.24 4.76,37.24 3.38,35.87 3.01,35.87 IC1.2
  Bottom 0.152: v5.01,37.24 4.88,37.37 4.88,44.87 5.76,45.74 5.76,48.99 4.63,50.12 3.63,50.12 3.63,51.62 4.26,52.24 9.13,52.24 13.01,56.12 16.88,56.12 17.01,56.24 17.88,56.24 17.88,54.62 16.76,53.49 U1.3
U_SD-2CH  (via drill 0.3)
  Top 0.152: v6.63,29.74 7.88,29.74 8.76,30.62 9.26,30.62 9.38,30.49 9.88,30.49 11.26,31.87 11.26,32.37 13.38,34.49 v14.63,34.49
  Bottom 0.152: v6.63,29.74 5.76,30.62 5.76,32.49 5.63,32.62 IC2.2 | v14.63,34.49 15.63,34.49 16.26,35.12 18.38,35.12 18.51,35.24 19.38,35.24 19.38,34.87 20.88,33.37 27.13,33.37 27.13,31.12 27.76,30.49 U5.3
  Bottom 0.2: 27.74,30.5 U5.3
V_BLDC-1CH  (via drill 0.3)
  Top 0.152: Q3.3 24.26,35.74 24.28,35.91 | 23.38,42.87 24.26,42.87 Q4.5 | Q3.2 24.26,37.12 24.28,37.12 | Q4.6 26.26,42.24 26.26,42.27 | Q4.7 27.51,42.24 27.51,42.27 | v23.76,40.62 24.19,41.05
  Top 2: 24.28,41.57 Q4.5 Q4.6 26.26,42.27 27.51,42.27 Q4.7 Q4.8 | X2.2 23.38,50.37 23.38,42.87 23.38,41.87 24.19,41.05 24.28,40.97 Q3.1 24.28,37.12 Q3.2 24.28,35.91
  Bottom 0.152: R6.1 25.88,37.37 C3.2 24.13,37.37 24.13,40.62 v23.76,40.62 20.63,40.62 U2.6
V_BLDC-2CH  (via drill 0.3)
  Top 0.152: v16.38,22.49 15.51,23.37 v14.01,23.37 14.01,22.74 12.88,21.62 12.88,18.12 14.88,16.12 20,16.12 23.28,12.83 23.73,12.83 23.76,12.87 24.88,12.87 25.38,12.87 26.35,12.87 29.35,9.87 | v29.88,23.62 28.73,24.76 | 29.48,26.99 29.51,26.99 Q9.1 | Q10.7 26.26,22.99 26.94,22.97 | Q10.6 27.51,22.99 27.23,23.26 | Q10.5 28.76,22.99 27.86,23.89 | Q9.2 29.51,28.24 Q9.2 | Q9.3 29.51,29.62 29.48,29.32
  Top 2: 29.48,29.32 Q9.2 29.48,26.99 Q9.1 29.48,25.51 28.73,24.76 27.86,23.89 27.23,23.26 26.94,22.97 Q10.7 Q10.8 23.38,21.37 23.38,15.83 29.35,9.87 X3.2
  Bottom 0.152: v14.01,23.37 14.01,24.24 13.88,24.37 C11.2 | v16.38,22.49 18.01,22.49 18.01,24.12 U6.6 | v29.88,23.62 29.88,22.62 30.13,22.37 R20.1
V_IN-1CH  (via drill 0.3)
  Top 0.152: v7.26,35.87 7.26,33.87 8.38,32.74 8.38,32.37 IC1.9 | v8.76,47.74 8.76,48.12 14.76,54.12 14.76,55.12 20.88,61.24 28.01,61.24 30.13,59.12 v30.38,59.12
  Bottom 0.152: v7.26,35.87 8.76,37.37 v8.76,47.74 | v30.38,59.12 34.26,55.24 34.26,51.99 28.88,46.62 16.88,46.62 16.88,44.12 15.13,42.37 14.13,42.37 14.13,40.12 15.13,39.12 U2.2
V_IN-2CH
  Bottom 0.152: IC2.9 11.88,31.24 12.38,31.24 12.38,31.62 12.76,31.99 14.63,31.99 14.63,31.62 15.63,30.62 16.63,30.62 16.63,29.62 U6.2
V_SD-1CH  (via drill 0.3)
  Top 0.152: v13.88,35.49 11.51,33.12 10.26,33.12 10.01,33.37 9.63,33.37 IC1.11
  Bottom 0.152: v13.88,35.49 17.38,35.49 17.38,38.37 15.26,40.49 U2.3
V_SD-2CH  (via drill 0.3)
  Top 0.152: v15.26,31.87 v13.13,29.74
  Bottom 0.152: v13.13,29.74 11.88,29.74 IC2.11 | v15.26,31.87 18.01,31.87 18.01,29.62 U6.3
VDD  (via drill 0.3)
  Top 0.152: v14.88,49.37 v13.38,47.87 | v27.26,39.62 28.51,38.37 Q3.8 | Q3.5 29.51,34.49 29.48,34.49 | Q3.6 29.51,35.74 Q3.6 | Q3.7 29.51,37.12 29.48,37.12 | v26.88,27.99 25.26,27.99 Q9.7 24.26,28.24 Q9.7 | Q5.6 37.51,35.74 Q5.6 | Q5.7 37.51,36.99 Q5.7 | Q1.6 21.51,35.74 Q1.6 | Q1.7 21.51,36.99 Q1.7 | Q9.6 24.26,29.62 Q9.5 | v40.26,32.49 40.26,32.37 | Q7.5 32.26,29.62 Q7.6 | v22.51,31.62 22.59,32.74 | Q11.8 16.26,26.99 16.28,27.52 | Q11.7 16.26,28.24 Q11.7 | 16.28,29.62 16.26,29.62 Q11.6 15.38,29.24 v14.63,29.24 | Q7.7 32.26,28.24 Q7.7 | 24.38,32.37 24.38,32.74 | v28.51,33.62 28.51,32.74 | Q1.5 21.51,34.12 21.51,32.87 | 37.48,34.87 36.63,34.87 35.88,33.87 | v8.63,17.87 8.63,22.49 6.01,25.12 6.01,25.99 6.38,26.37 9.13,26.37 9.63,25.87 11.13,25.87 15.38,30.12 16.28,30.12 | 29.48,33.99 29.51,33.99 29.51,32.74 | v31.88,50.49 37.01,50.49 43.13,44.37 43.13,43.49 43.63,42.99 46.26,42.99 v47.01,42.24 | v47.76,40.37 47.76,37.87 43.38,33.49 42.88,32.37
  Top 2: 16.28,27.52 Q11.7 Q11.6 16.28,29.62 16.28,30.12 Q11.5 17.02,31.51 | Q1.5 Q1.6 Q1.7 Q1.8 | Q9.8 Q9.7 Q9.6 Q9.5 | 29.48,33.31 29.48,33.99 Q3.5 29.48,34.49 Q3.6 Q3.7 29.48,37.12 Q3.8 | Q7.8 Q7.7 Q7.6 Q7.5 | 35.81,34.3 37.32,34.3 Q5.5 37.48,34.87 Q5.6 Q5.7 Q5.8
  Top 2.54: 17.02,31.51 18.38,32.87 21.51,32.87 22.46,32.87 22.59,32.74 24.38,32.74 28.51,32.74 29.51,32.74 32.38,32.74 | 32.38,32.74 34.75,32.74 | 34.75,32.74 35.88,33.87 | Q7.5 32.28,32.64 32.38,32.74 | Q9.5 24.28,32.27 24.38,32.37 | 34.75,32.74 37.88,32.74 | 37.88,32.74 38.13,32.49 39.17,32.49 | X1.2 46.36,28.89 42.88,32.37 40.26,32.37 39.3,32.37 39.17,32.49 | 37.88,32.74 38.92,32.74 39.17,32.49
  Bottom 0.152: 27.01,54.37 26.51,53.87 D6.A 27.01,54.37 | 27.01,54.37 27.01,56.99 27.76,57.74 27.76,58.87 25.76,60.87 18.26,60.87 18.26,52.49 16.76,50.99 U1.1 16.01,50.87 16.01,50.49 v14.88,49.37 | v13.38,47.87 12.26,46.74 12.26,37.74 15.13,37.74 U2.1 | D1.A 27.26,39.37 v27.26,39.62 | D3.A 28.63,24.37 28.63,26.37 C14.2 | v26.88,27.99 28.13,27.99 U5.1 | D5.A 13.13,13.87 11.38,15.62 D4.A 11.38,16.74 8.63,16.74 v8.63,17.87 | v40.26,32.49 40.26,33.24 39.88,33.62 D2.A | v22.51,31.62 22.51,29.62 U7.1 | 14.82,28.93 14.63,29.12 v14.63,29.24 | 28.78,34.02 28.51,33.74 v28.51,33.62 | 27.01,54.37 28.01,54.37 v31.88,50.49 | v47.01,42.24 47.76,41.49 v47.76,40.37
  Bottom 0.2: C6.2 16.04,50.96 U1.1 | C4.2 28.78,34.02 28.16,34.64 U3.1 | C14.2 28.16,26.84 U5.1 | U7.1 21.6,28.72 C9.2 | C12.2 14.08,28.19 14.82,28.93 U6.1 | C2.2 15.16,37.64 U2.1
W_BLDC-1CH  (via drill 0.3)
  Top 0.152: v32.38,39.12 32.28,39.12 | v40.88,35.62 41.88,36.62 41.88,37.12 36.76,42.24 Q6.8 | Q6.6 33.26,42.24 33.26,42.27 | Q6.7 34.51,42.24 34.51,42.27
  Top 0.406: Q5.3 32.28,35.91 Q5.2 Q5.1 | Q6.5 Q6.6 33.26,42.27 33.38,42.27
  Top 2: 33.38,42.27 34.51,42.27 Q6.7 Q6.8 | X2.3 30.38,51.96 30.38,44.37 31.98,42.77 Q6.5 32.28,41.96 32.28,39.12 32.28,35.91
  Bottom 0.152: R10.1 37.76,33.87 37.88,33.99 C5.2 37.88,35.62 v40.88,35.62 | v32.38,39.12 32.38,37.62 33.51,37.62 U3.6
W_BLDC-2CH  (via drill 0.3)
  Top 0.152: 21.79,25.37 v24.76,25.37 | v14.01,15.87 13.69,15.55 | Q12.7 19.26,22.99 19.26,22.97 | Q12.6 20.51,22.99 20.51,22.97 | Q11.1 21.51,26.99 21.79,26.99 | Q11.2 21.51,28.24 21.79,29.01 | Q11.3 21.51,29.62 21.48,29.32
  Top 2: 21.48,29.32 21.79,29.01 21.79,26.99 21.79,25.37 Q12.5 Q12.6 20.51,22.97 19.26,22.97 Q12.7 Q12.8 15.58,25.37 12.38,25.37 10.88,23.87 10.88,18.37 13.69,15.55 14.38,14.87 18.88,14.87 26.68,7.07 X3.3
  Bottom 0.152: 15.01,15.87 15.01,17.37 R24.1 | v24.76,25.37 24.76,24.49 25.01,24.24 U7.6 | v14.01,15.87 15.01,15.87 | 15.01,15.87 C13.2
W_IN-1CH  (via drill 0.3)
  Top 0.152: v9.63,31.12 9.63,31.99 9.01,32.62 9.01,32.87 IC1.10 | v9.63,28.87 10.13,28.87 11.63,30.37 11.63,32.24 13.01,33.62 v14.76,33.62 | v19.88,35.74 v18.76,34.62
  Bottom 0.152: v9.63,28.87 v9.63,31.12 | v14.76,33.62 15.26,33.62 16.26,34.62 v18.76,34.62 | v19.88,35.74 20.26,35.74 22.13,33.87 27.13,33.87 27.13,35.37 27.88,36.12 28.13,36.12 U3.2
W_IN-2CH  (via drill 0.3)
  Top 0.152: v13.01,31.37 13.38,31.37 15.26,33.24 v16.26,33.24
  Bottom 0.152: v13.01,31.37 13.01,30.49 11.88,30.49 IC2.10 | v16.26,33.24 19.88,33.24 20.51,32.62 23.63,32.62 23.63,29.62 U7.2
W_SD-1CH  (via drill 0.3)
  Top 0.152: v13.51,38.37 13.51,36.12 11.01,33.62 10.88,33.62 10.51,33.99 10.26,33.99 IC1.12 | v13.76,42.87 16.26,42.87 v17.51,44.12
  Bottom 0.152: v13.51,38.37 13.76,38.62 v13.76,42.87 | v17.51,44.12 17.76,43.87 17.76,39.74 19.26,38.24 19.26,37.24 22.01,34.49 23.38,34.49 23.38,35.99 23.76,36.37 27.13,36.37 27.13,36.62 28.13,37.62 U3.3
W_SD-2CH  (via drill 0.3)
  Top 0.152: v13.01,28.87 12.51,29.37 12.51,29.99 15.13,32.62 v15.63,32.62
  Bottom 0.152: v13.01,28.87 11.88,28.87 IC2.12 | v15.63,32.62 19.76,32.62 20.13,32.24 23.13,32.24 23.13,28.87 23.38,28.62 25.01,28.62 25.01,29.49 U7.3